# Altium PCB shield_can-display.PcbDoc (part 2 of 2)
Units mm, origin at the board's own origin, x right, y up, seen from the top; angles counter-clockwise.
Board outline 185 x 125 mm, 2 copper layers (Top Layer, Bottom Layer), stack 1.57 mm thick; 102 components, 185 nets, 477 pads, 180 vias.
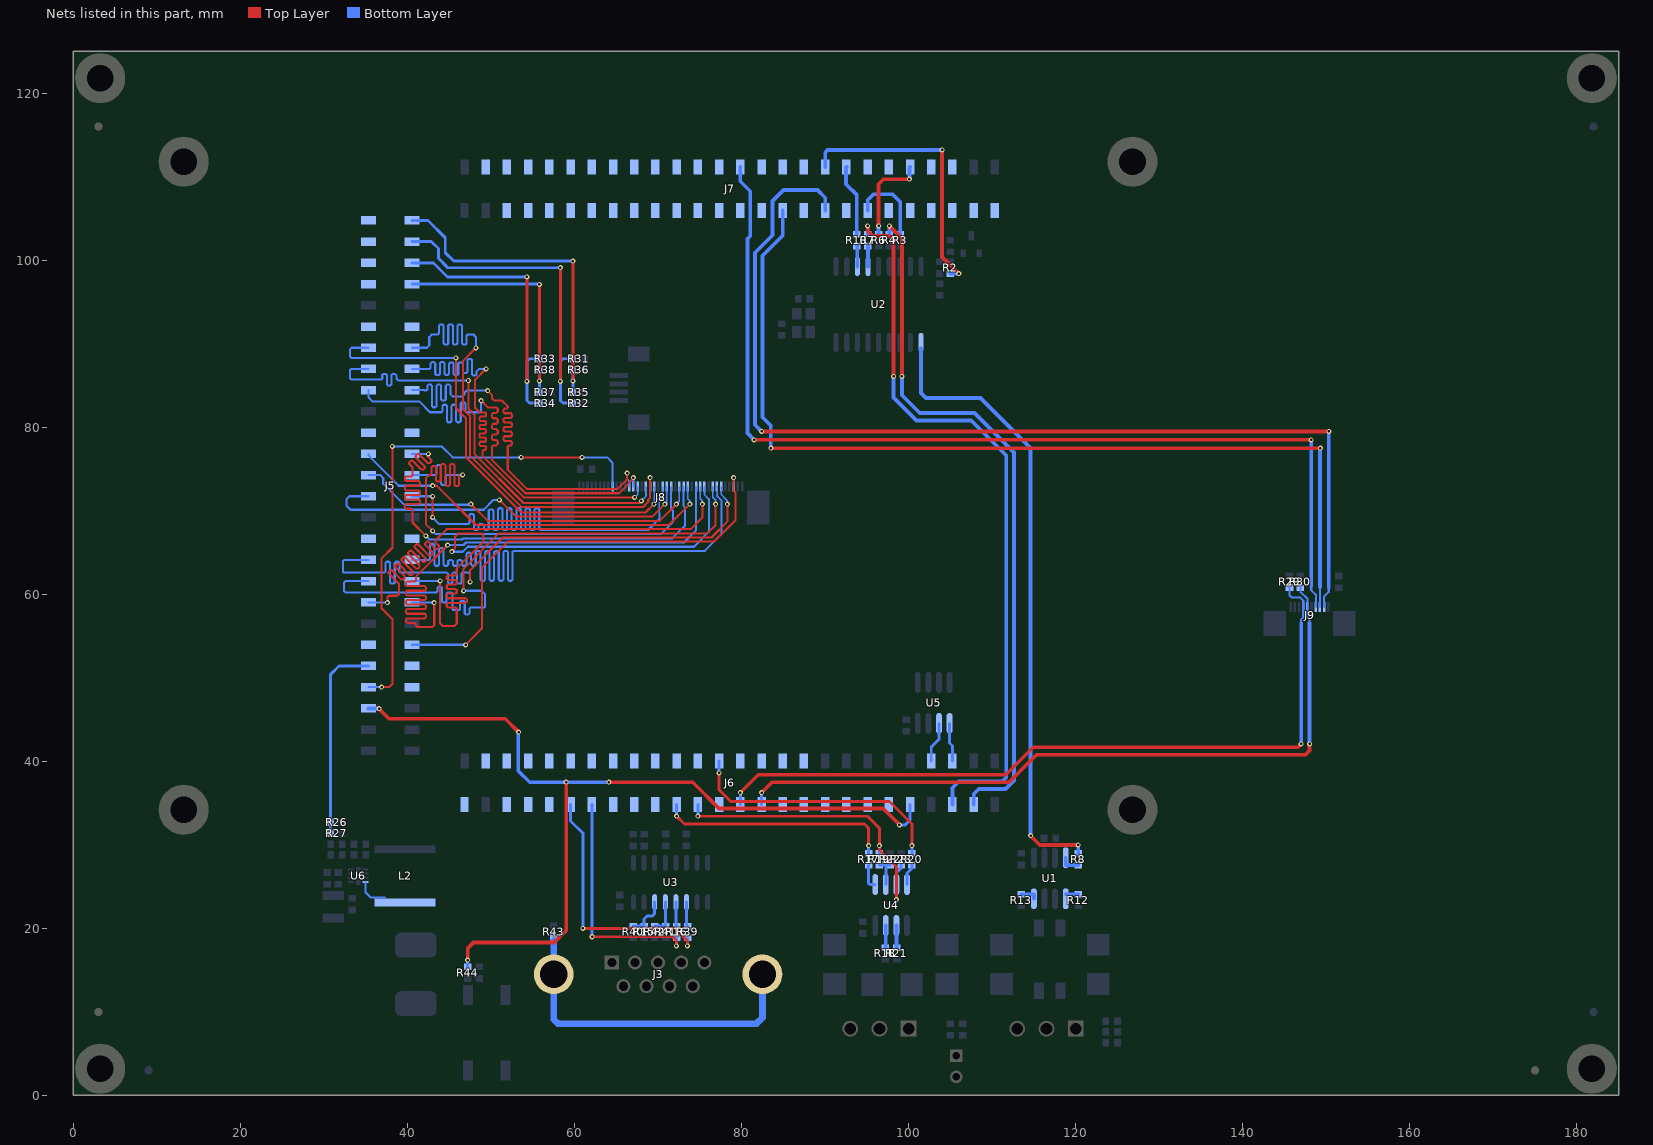
[diagram p2: the nets of this part, all layers, seen from the top]

## Via types
v1: diameter 0.6, hole 0.3, Top Layer to Bottom Layer, 180 vias

## Nets (pads, with @x,y where several pads share a name; then routed paths per layer and width w, separated by ;. In a path a pad name is that pad's centre, name@x,y a point inside that pad or via, vN(x,y) a via of type N, cw(c..) or ccw(c..) an arc to the next point about the centre after c; other vN are vias at no path point) (continued)
NetR7_2: R7.2 U2.13 | length 2.5
  Bottom Layer w0.45: R7.2@95.1,101.7 95.13,101.67 U2.13@95.13,99.25
NetR8_1: R8.1 U2.1 | length 74.8
  Top Layer w0.45: v1(114.6,31.1) 115.7,30 v1(120.3,30)
  Bottom Layer w0.45: U2.1@101.48,89.45 101.48,84.093 102.073,83.5 108.618,83.5 114.6,77.518 v1(114.6,31.1) ; R8.1@120.3,29 v1(120.3,30)
NetR8_2: R8.2 U1.4 | length 2.3
  Bottom Layer w0.45: U1.4@118.805,28.45 118.805,27.6 R8.2@120.3,27.6
NetR10_2: R10.2 U2.12 | length 2.5
  Bottom Layer w0.45: R10.2@93.8,101.7 93.86,101.64 U2.12@93.86,99.25
NetR13_2: R13.2 U1.8 | length 2
  Bottom Layer w0.45: R13.2@113.5,24.1 114.995,24.1 U1.8@114.995,23.55
NetR15_1: R15.1 R40.1 U3.14 | length 5.1
  Bottom Layer w0.35: R40.1@67.029,20.275 R15.1@68.329,20.275 68.329,21.129 68.7,21.5 69.3,21.5 69.595,21.795 U3.14@69.595,23.15
NetR16_2: R16.2 U3.12 | length 2.9
  Bottom Layer w0.35: U3.12@72.135,23.15 72.135,20.369 R16.2@72.229,20.275
NetR17_1: R17.1 U4.1 | length 3.1
  Bottom Layer w0.35: R17.1@95.2,27.6 95.2,25.4 95.35,25.25 U4.1@95.995,25.25
NetR18_1: R18.1 U4.7 | length 2.7
  Bottom Layer w0.45: R18.1@97.2,17.7 97.265,17.765 U4.7@97.265,20.35
NetR19_1: R19.1 R22.2 U4.2 | length 3.7
  Bottom Layer w0.35: R19.1@96.5,27.6 97.3,27.6 ; U4.2@97.265,25.25 97.265,27.565 97.3,27.6 ; R22.2@97.8,27.6 97.3,27.6
NetR20_1: R20.1 U4.4 | length 2.6
  Bottom Layer w0.35: U4.4@99.805,25.25 99.805,26.605 100.4,27.2 R20.1@100.4,27.6
NetR21_1: R21.1 U4.6 | length 2.7
  Bottom Layer w0.45: U4.6@98.535,20.35 98.535,17.765 R21.1@98.6,17.7
NetR39_2: R39.2 U3.11 | length 2.9
  Bottom Layer w0.35: U3.11@73.405,23.15 73.405,20.399 R39.2@73.529,20.275
NetR41_1: R41.1 R42.1 U3.13 | length 4.2
  Bottom Layer w0.35: R42.1@69.629,20.275 R41.1@70.929,20.275 70.865,20.339 U3.13@70.865,23.15
PA0_LCDDAT0_TMS_A7: J5.41
PA1_LCDDAT1_F6: J5.42
PA2_LCDDAT2_G1_TXCK_E6: J5.39 J8.22 | length 55.9
  Top Layer w0.25: v1@45.8,88.2 45.8,82.3 47,81.1 47,76.4 53.6,69.8 68.5,69.8 v1(69.5,70.8)
  Bottom Layer w0.2: v1@69.5,70.9 69.55,70.95 J8.22@69.55,72.89 J8.22@69.5,72.84
  Bottom Layer w0.25: J5.39@35.34,89.52 33.32,89.52 33.1,89.3 33.1,88.5 33.3,88.3 v1(45.8,88.3)
PA3_LCDDAT3_G1_RXCK_C6: J5.40 J8.23 | length 65.8
  Top Layer w0.25: v1(48.2,89.5) 46.625,87.925 46.625,82.182 47.5,81.307 47.5,76.607 53.674,70.433 68.188,70.433 68.825,71.07 68.825,71.325 69.05,71.55 v1(69.05,73.98)
  Bottom Layer w0.2: J8.23@69.05,72.89 v1(69.05,73.98)
  Bottom Layer w0.25: J5.40@40.54,89.52 42.28,89.52 42.3,89.5 42.6,89.8 42.6,90.8 42.9,91.1 43.637,91.1 43.775,91.238 43.775,92.162 43.912,92.3 44.187,92.3 44.325,92.162 44.325,90.038 44.462,89.9 44.737,89.9 44.875,90.038 44.875,92.162 45.012,92.3 45.287,92.3 45.425,92.162 45.425,90.038 45.562,89.9 45.837,89.9 45.975,90.038 45.975,92.162 46.112,92.3 46.387,92.3 46.525,92.162 46.525,90.038 46.662,89.9 46.937,89.9 47.075,90.038 47.075,90.963 47.212,91.1 47.9,91.1 48.2,90.8 v1(48.2,89.5)
PA4_LCDDAT4_G1_TXEN_D6: J5.37 J8.24 | length 54.6
  Top Layer w0.25: v1(47.3,85.6) 47.3,82.214 48,81.514 48,76.814 53.881,70.933 67.733,70.933 v1(68,71.2)
  Bottom Layer w0.2: v1(68,71.2) 68.55,71.75 J8.24@68.55,72.89
  Bottom Layer w0.25: J5.37@35.34,86.98 33.28,86.98 33.1,86.8 33.1,85.9 33.3,85.7 36.837,85.7 36.975,85.837 36.975,86.262 37.112,86.4 37.387,86.4 37.525,86.262 37.525,85.138 37.662,85 37.937,85 38.075,85.138 38.075,86.262 38.212,86.4 38.487,86.4 38.7,86.187 38.7,85.8 38.9,85.6 v1(47.3,85.6)
PA5_LCDDAT5_G1_TXER_B6: J5.38 J8.26 | length 61.7
  Top Layer w0.25: v1(49.4,87) 48.1,85.7 48.1,82.3 48.629,81.771 49.275,81.771 49.4,81.646 49.4,81.396 49.275,81.271 48.725,81.271 48.6,81.146 48.6,80.896 48.725,80.771 49.275,80.771 49.4,80.646 49.4,80.396 49.275,80.271 48.725,80.271 48.6,80.146 48.6,79.896 48.725,79.771 49.275,79.771 49.4,79.646 49.4,79.396 49.275,79.271 48.725,79.271 48.6,79.146 48.6,78.896 48.725,78.771 49.275,78.771 49.4,78.646 49.4,78.396 49.275,78.271 48.725,78.271 48.6,78.146 48.6,77.896 48.725,77.771 49.275,77.771 49.4,77.646 49.4,77.396 49.275,77.271 49.125,77.271 49,77.146 49,76.521 53.921,71.6 67.192,71.6 v1(67.2,71.608)
  Bottom Layer w0.2: v1(67.2,71.608) 67.55,71.958 J8.26@67.55,72.89
  Bottom Layer w0.25: J5.38@40.54,86.98 42.618,86.98 42.775,87.138 42.775,87.658 42.912,87.796 43.187,87.796 43.325,87.658 43.325,86.402 43.462,86.264 43.737,86.264 43.875,86.402 43.875,87.658 44.012,87.796 44.287,87.796 44.425,87.658 44.425,86.402 44.562,86.264 44.837,86.264 44.975,86.402 44.975,87.616 45.112,87.754 45.387,87.754 45.525,87.616 45.525,86.402 45.662,86.264 45.937,86.264 46.075,86.402 46.075,87.616 46.212,87.754 46.487,87.754 46.625,87.616 46.625,86.617 46.762,86.479 47.037,86.479 47.175,86.617 47.175,88.058 47.312,88.196 47.587,88.196 47.725,88.058 47.725,86.334 47.862,86.196 48.137,86.196 48.275,86.334 48.275,86.7 48.575,87 v1(49.4,87)
PA6_LCDDAT6_G1_CRS_A6: J5.35 J8.27 | length 58.9
  Top Layer w0.25: v1(48.8,83.2) 49.625,82.375 50.637,82.375 50.8,82.213 50.8,81.888 50.637,81.725 50.262,81.725 50.1,81.563 50.1,81.238 50.262,81.075 50.637,81.075 50.8,80.913 50.8,80.588 50.637,80.425 50.262,80.425 50.1,80.263 50.1,79.938 50.262,79.775 50.637,79.775 50.8,79.613 50.8,79.288 50.637,79.125 50.262,79.125 50.1,78.963 50.1,78.638 50.262,78.475 50.637,78.475 50.8,78.313 50.8,77.988 50.637,77.825 50.262,77.825 50.1,77.663 50.1,76.128 54.128,72.1 65.332,72.1 67.05,73.818 v1(67.05,73.98)
  Bottom Layer w0.2: J8.27@67.05,72.89 v1(67.05,73.98)
  Bottom Layer w0.25: J5.35@35.34,84.44 35.34,83.56 35.8,83.1 41.4,83.1 42.7,81.8 44.037,81.8 44.175,81.937 44.175,82.563 44.312,82.7 44.587,82.7 44.725,82.563 44.725,80.738 44.862,80.6 45.137,80.6 45.275,80.738 45.275,82.563 45.412,82.7 45.687,82.7 45.825,82.563 45.825,80.738 45.962,80.6 46.237,80.6 46.375,80.738 46.375,82.862 46.512,83 46.787,83 46.925,82.862 46.925,81.937 47.062,81.8 48.657,81.8 48.8,81.943 v1(48.8,83.2)
PA7_LCDDAT7_E5: J5.36 J8.28 | length 55.5
  Top Layer w0.25: v1(49.58,84.4) 50.1,83.88 50.1,83.5 50.4,83.2 51.3,83.2 52,82.5 52,82.363 51.862,82.225 51.638,82.225 51.5,82.088 51.5,81.813 51.638,81.675 52.362,81.675 52.5,81.538 52.5,81.263 52.362,81.125 51.638,81.125 51.5,80.988 51.5,80.713 51.638,80.575 52.362,80.575 52.5,80.438 52.5,80.163 52.362,80.025 51.638,80.025 51.5,79.888 51.5,79.613 51.638,79.475 52.362,79.475 52.5,79.338 52.5,79.063 52.362,78.925 51.638,78.925 51.5,78.788 51.5,78.513 51.638,78.375 52.362,78.375 52.5,78.238 52.5,77.963 52.362,77.825 52.138,77.825 52,77.688 52,74.936 54.336,72.6 65.125,72.6 66.3,73.775 v1(66.3,74.5)
  Bottom Layer w0.2: v1(66.3,74.5) 66.3,73.811 66.55,73.561 J8.28@66.55,72.89
  Bottom Layer w0.25: J5.36@40.54,84.44 42.06,84.44 42.1,84.4 42.237,84.4 42.375,84.537 42.375,84.962 42.512,85.1 42.787,85.1 42.925,84.962 42.925,82.538 43.062,82.4 43.337,82.4 43.475,82.538 43.475,84.962 43.612,85.1 43.887,85.1 44.025,84.962 44.025,83.338 44.162,83.2 44.437,83.2 44.575,83.338 44.575,84.962 44.712,85.1 44.987,85.1 45.125,84.962 45.125,83.975 45.4,83.7 46.6,83.7 46.8,83.9 46.8,84.1 47.1,84.4 v1(49.58,84.4)
PA8_LCDDAT8_TCK_A5: J5.31
PA9_LCDDAT9_G1_COL_F4: J5.32
PA10_LCDDAT10_G1_RXDV_F5: J5.29 J8.14 | length 45.3
  Top Layer w0.25: v1(43,73) 43.5,73 48.2,68.3 71.3,68.3 v1(73.8,70.8)
  Bottom Layer w0.2: J8.14@73.55,72.89 73.55,71.45 73.8,71.2 v1(73.8,70.8)
  Bottom Layer w0.25: J5.29@35.34,76.82 35.34,76.6 38.94,73 v1(43,73)
PA11_LCDDAT11_G1_RXER_D5: J5.30 J8.15 | length 67.7
  Top Layer w0.25: v1(42.2,67) 40.6,68.6 40.6,70.108 40.462,70.245 39.837,70.245 39.7,70.383 39.7,70.658 39.837,70.795 41.363,70.795 41.5,70.933 41.5,71.208 41.363,71.345 39.837,71.345 39.7,71.483 39.7,71.758 39.837,71.895 41.363,71.895 41.5,72.033 41.5,72.308 41.363,72.445 39.837,72.445 39.7,72.583 39.7,72.858 39.837,72.995 41.363,72.995 41.5,73.133 41.5,73.408 41.363,73.545 39.837,73.545 39.7,73.683 39.7,73.958 39.837,74.095 40.462,74.095 40.6,74.233 40.6,75.22 40.211,75.609 40.211,75.804 40.405,75.998 40.6,75.998 41.678,74.92 41.872,74.92 42.067,75.114 42.067,75.309 40.989,76.387 40.989,76.582 41.183,76.776 41.377,76.776 42.456,75.698 42.65,75.698 42.845,75.892 42.845,76.087 42.403,76.528 42.403,76.723 v1(42.5,76.82)
  Bottom Layer w0.2: J8.15@73.05,72.89 73.05,70.55 73.2,70.4
  Bottom Layer w0.25: J5.30@40.54,76.82 v1(42.5,76.82) ; v1(42.2,67) 42.625,66.575 46.575,66.575 46.7,66.7 71.7,66.7 73.075,68.075 ; 72.9,67.9 73.2,68.2 73.2,70.4
PA12_LCDDAT12_G1_RX0_G5: J5.27 J8.16 | length 42.6
  Top Layer w0.25: v1(47.6,70.8) 49.6,68.8 70.2,68.8 v1(72.2,70.8)
  Bottom Layer w0.2: v1(72.2,70.8) 72.55,71.15 J8.16@72.55,72.89
  Bottom Layer w0.25: J5.27@35.34,74.28 36.72,74.28 37.1,73.9 37.1,73.24 39.615,70.725 47.525,70.725 v1(47.6,70.8)
PA13_LCDDAT13_G1_RX1_C5: J5.28 J8.18 | length 68.4
  Top Layer w0.25: v1(43,67.6) 42.2,68.4 42.2,73.88 42.6,74.28 42.737,74.28 42.875,74.418 42.875,75.215 43.012,75.353 43.287,75.353 43.425,75.215 43.425,73.638 43.562,73.5 43.837,73.5 43.975,73.638 43.975,75.443 44.112,75.58 44.387,75.58 44.525,75.443 44.525,73.118 44.662,72.98 44.937,72.98 45.075,73.118 45.075,75.443 45.212,75.58 45.487,75.58 45.625,75.443 45.625,73.118 45.762,72.98 46.037,72.98 46.175,73.118 46.175,74.143 46.312,74.28 46.58,74.28 v1(46.6,74.3)
  Bottom Layer w0.2: J8.18@71.55,72.89 71.55,70.25 71.6,70.2
  Bottom Layer w0.25: J5.28@40.54,74.28 43.337,74.28 43.475,74.418 43.475,75.343 43.612,75.48 43.887,75.48 44.025,75.343 44.025,73.218 44.162,73.08 44.437,73.08 44.575,73.218 44.575,74.143 44.712,74.28 46.58,74.28 v1(46.6,74.3) ; v1(43,67.6) 43.4,67.2 70.3,67.2 71.8,68.7 71.8,70 71.6,70.2
PA14_LCDDAT14_G1_TX0_E4: J5.25 J8.19 | length 46
  Top Layer w0.25: v1(51,71.3) 53,69.3 69.3,69.3 v1(70.8,70.8)
  Bottom Layer w0.2: v1(70.8,70.8) 71.05,71.05 J8.19@71.05,72.89
  Bottom Layer w0.25: J5.25@35.34,71.74 33.04,71.74 32.7,71.4 32.7,70.6 33.175,70.125 49.125,70.125 50.3,71.3 v1(51,71.3)
PA15_LCDDAT15_G1_TX1_B5: J5.26 J8.20 | length 69.9
  Top Layer w0.25: v1(43,69.2) v1(43,71.74)
  Bottom Layer w0.2: 70.15,69.65 70.15,71.069 70.55,71.469 J8.20@70.55,72.89
  Bottom Layer w0.25: J5.26@40.54,71.74 v1(43,71.74) ; v1(43,69.2) 43.8,68.4 47.263,68.4 47.4,68.538 47.4,69.487 47.538,69.625 47.813,69.625 47.95,69.487 47.95,67.838 48.088,67.7 48.363,67.7 48.5,67.838 48.5,68.262 48.638,68.4 49,68.4 49.175,68.225 49.175,67.838 49.313,67.7 49.588,67.7 49.725,67.838 49.725,70.018 49.863,70.155 50.138,70.155 50.275,70.018 50.275,67.838 50.413,67.7 50.688,67.7 50.825,67.838 50.825,70.162 50.963,70.3 51.238,70.3 51.375,70.162 51.375,67.838 51.513,67.7 51.788,67.7 51.925,67.838 51.925,70.162 52.063,70.3 52.338,70.3 52.475,70.162 52.475,67.838 52.613,67.7 52.888,67.7 53.025,67.838 53.025,70.162 53.163,70.3 53.438,70.3 53.575,70.162 53.575,67.838 53.713,67.7 53.988,67.7 54.125,67.838 54.125,70.162 54.263,70.3 54.538,70.3 54.675,70.162 54.675,67.838 54.813,67.7 55.088,67.7 55.225,67.838 55.225,70.162 55.363,70.3 55.638,70.3 55.775,70.162 55.775,67.838 55.913,67.7 68.8,67.7 70.15,69.05 70.15,69.65
PA16_LCDDAT16_NTRST_H6: J5.21
PA17_LCDDAT17_D4: J5.22
PA18_LCDDAT18_G1_RX2_G4: J5.19 J8.6 | length 71.4
  Top Layer w0.25: v1(47.5,61.5) 47.5,62.9 51.4,66.8 76.4,66.8 78.3,68.7 v1(78.3,70.8)
  Bottom Layer w0.2: J8.6@77.55,72.89 77.55,71.95 78.3,71.2 v1(78.3,70.8)
  Bottom Layer w0.25: J5.19@35.34,64.12 32.42,64.12 32.3,64 32.3,62.7 32.4,62.6 37.237,62.6 37.375,62.737 37.375,63.762 37.512,63.9 37.787,63.9 37.925,63.762 37.925,61.438 38.062,61.3 38.337,61.3 38.475,61.438 38.475,63.762 38.612,63.9 38.887,63.9 39.025,63.762 39.025,62.737 39.162,62.6 44.687,62.6 44.825,62.462 44.825,61.438 44.962,61.3 45.237,61.3 45.375,61.438 45.375,62.462 45.512,62.6 45.787,62.6 45.925,62.462 45.925,61.438 46.062,61.3 46.337,61.3 46.475,61.438 46.475,62.462 46.612,62.6 47.3,62.6 47.5,62.4 v1(47.5,61.5)
PA19_LCDDAT19_G1_RX3_C4: J5.20 J8.7 | length 85.6
  Bottom Layer w0.2: 77.075,71.825 J8.7@77.075,72.865
  Bottom Layer w0.25: J5.20@40.54,64.12 42.38,64.12 42.4,64.1 42.537,64.1 42.675,64.237 42.675,65.913 42.812,66.051 43.087,66.051 43.225,65.913 43.225,63.561 43.362,63.424 43.637,63.424 43.775,63.561 43.775,65.396 43.912,65.534 44.187,65.534 44.325,65.396 44.325,63.561 44.462,63.424 44.737,63.424 44.875,63.561 44.875,63.962 45.012,64.1 45.287,64.1 45.425,63.962 45.425,63.561 45.562,63.424 45.837,63.424 45.975,63.561 45.975,63.962 46.112,64.1 46.387,64.1 46.525,63.962 46.525,63.561 46.662,63.424 46.937,63.424 47.075,63.561 47.075,64.837 47.212,64.974 47.487,64.974 47.625,64.837 47.625,63.554 47.762,63.416 48.037,63.416 48.175,63.554 48.175,65.039 48.312,65.176 48.587,65.176 48.725,65.039 48.725,61.761 48.862,61.624 49.137,61.624 49.275,61.761 49.275,65.039 49.412,65.176 49.687,65.176 49.825,65.039 49.825,61.761 49.962,61.624 50.237,61.624 50.375,61.761 50.375,65.039 50.512,65.176 50.787,65.176 50.925,65.039 50.925,61.761 51.062,61.624 51.337,61.624 51.475,61.761 51.475,65.039 51.612,65.176 51.887,65.176 52.025,65.039 52.025,61.761 52.162,61.624 52.437,61.624 52.575,61.761 52.575,65.075 52.7,65.2 75.6,65.2 77.575,67.175 77.575,71.253 77.075,71.753 77.075,71.825 ; J8.7@77.05,72.89 J8.7@77.075,72.865
PA20_LCDDAT20_G1_TX2_A3: J5.17 J8.8 | length 73.4
  Top Layer w0.25: v1(46.725,60.425) 46.725,63.08 50.945,67.3 75.9,67.3 76.9,68.3 v1(76.9,70.8)
  Bottom Layer w0.2: J8.8@76.55,72.89 76.55,71.607 76.9,71.256 v1(76.9,70.8)
  Bottom Layer w0.25: J5.17@35.34,61.58 32.58,61.58 32.4,61.4 32.4,60.4 32.6,60.2 43.437,60.2 43.575,60.337 43.575,60.787 43.712,60.925 43.987,60.925 44.125,60.787 44.125,59.137 44.262,59 44.537,59 44.675,59.137 44.675,60.062 44.812,60.2 45.275,60.2 45.4,60.075 45.4,58.2 45.5,58.1 46.2,58.1 46.3,58.2 46.3,59.063 46.438,59.2 46.713,59.2 46.85,59.063 46.85,57.737 46.988,57.6 47.263,57.6 47.4,57.737 47.4,58.262 47.538,58.4 49.2,58.4 49.3,58.5 49.3,60.025 48.9,60.425 v1(46.725,60.425)
PA21_LCDDAT21_G1_TX3_B4: J5.18 J8.10 | length 76.4
  Top Layer w0.25: v1(43.9,61.6) 43.9,56.5 44.2,56.2 45.6,56.2 45.9,56.5 45.9,58.288 45.762,58.425 44.837,58.425 44.7,58.563 44.7,58.838 44.837,58.975 46.962,58.975 47.1,59.113 47.1,59.388 46.962,59.525 44.837,59.525 44.7,59.663 44.7,59.938 44.837,60.075 45.762,60.075 45.9,60.213 45.9,60.488 45.762,60.625 44.837,60.625 44.7,60.763 44.7,61.038 44.837,61.175 45.762,61.175 45.9,61.313 45.9,61.588 45.762,61.725 44.837,61.725 44.7,61.863 44.7,62.138 44.837,62.275 45.762,62.275 45.9,62.413 45.9,63.1 49.1,66.3 49.1,67.1 48.9,67.3 46.1,67.3 45.7,66.9 45.7,65.5 v1(45.3,65.1)
  Bottom Layer w0.2: J8.10@75.55,72.89 75.55,71.905 76,71.455
  Bottom Layer w0.25: J5.18@40.54,61.58 43.88,61.58 v1(43.9,61.6) ; v1(45.3,65.1) 46.607,65.1 47.207,65.7 74.3,65.7 76.075,67.475 76.075,71.38 76,71.455
PA22_LCDDAT22_G1_MDC_B3: J5.15 J8.11 | length 72.5
  Top Layer w0.25: v1(37.6,59) 37.6,59.687 37.738,59.825 38.763,59.825 38.981,60.043 38.981,61.264 37.75,62.494 37.75,62.689 37.945,62.883 38.139,62.883 39.267,61.756 39.461,61.756 39.656,61.95 39.656,62.145 38.528,63.272 38.528,63.467 38.723,63.661 38.917,63.661 40.288,62.29 40.483,62.29 40.677,62.484 40.677,62.679 39.306,64.05 39.306,64.244 39.5,64.439 39.695,64.439 41.066,63.068 41.26,63.068 41.455,63.262 41.455,63.456 40.084,64.828 40.084,65.022 40.278,65.217 40.473,65.217 41.844,63.845 42.038,63.845 42.233,64.04 42.233,64.234 40.862,65.606 40.862,65.8 41.056,65.994 41.25,65.994 42.622,64.623 42.816,64.623 43.011,64.818 43.011,65.012 42.109,65.913 42.109,66.108 42.304,66.302 42.498,66.302 43.399,65.401 43.594,65.401 43.788,65.595 43.788,65.79 43.336,66.242 43.336,66.436 44.7,67.8 73.9,67.8 75.3,69.2 v1(75.3,70.8)
  Bottom Layer w0.2: J8.11@75.05,72.89 75.05,71.45 75.3,71.2 v1(75.3,70.8)
  Bottom Layer w0.25: J5.15@35.34,59.04 37.56,59.04 v1(37.6,59)
PA23_LCDDAT23_G1_MDIO_A4: J5.16 J8.12 | length 74.7
  Top Layer w0.25: v1(43.2,59) 43.2,56.3 43,56.1 41.2,56.1 41,56.3 41,56.437 40.862,56.575 39.937,56.575 39.8,56.712 39.8,56.987 39.937,57.125 42.062,57.125 42.2,57.262 42.2,57.537 42.062,57.675 39.937,57.675 39.8,57.812 39.8,58.087 39.937,58.225 42.062,58.225 42.2,58.362 42.2,58.637 42.062,58.775 39.937,58.775 39.8,58.912 39.8,59.187 39.937,59.325 42.062,59.325 42.2,59.462 42.2,59.737 42.062,59.875 39.937,59.875 39.8,60.012 39.8,60.287 39.937,60.425 42.062,60.425 42.2,60.562 42.2,60.837 42.062,60.975 39.937,60.975 39.8,61.112 39.8,61.387 39.937,61.525 40.862,61.525 41,61.662 41,62.1 v1(44.8,65.9)
  Bottom Layer w0.2: 74.55,71.45 J8.12@74.55,72.89
  Bottom Layer w0.25: J5.16@40.54,59.04 43.24,59.04 v1(43.2,59) ; v1(44.8,65.9) 46.7,65.9 47,66.2 73.1,66.2 74.55,67.65 74.55,71.45
PA24_LCDPWM_PCK0_H5: J5.9 R26.2 R27.1 | length 24
  Bottom Layer w0.35: R27.1@30.8,31.4 30.8,50.42 31.8,51.42 J5.9@35.34,51.42
PA25_LCDDISP_TD0_F3: J5.11
PA26_LCDVSYNC_PWMH0_SP1_NPCS1_E3: J5.10
PA27_LCDHSYNC_PWML0_SPI1_NPCS2_H4: J5.8
PA28_LCDPCK_PWMH1_SP1_NPCS3_G3: J5.12 J8.3 | length 55.5
  Top Layer w0.25: v1(46.96,53.96) 48.9,55.9 48.9,63.2 52,66.3 76.7,66.3 79.275,68.875 79.275,72.18 79.05,72.405 v1(79.05,73.98)
  Bottom Layer w0.2: J8.3@79.05,72.89 v1(79.05,73.98)
  Bottom Layer w0.25: J5.12@40.54,53.96 v1(46.96,53.96)
PA29_LCDDEN_PWML1_J5: J5.7 J8.32 | length 62.5
  Top Layer w0.25: v1(36.9,48.9) 37.8,48.9 38.2,49.3 38.2,57 36.9,58.3 36.9,64.3 38.2,65.6 v1(38.2,77.7) ; v1(53.6,76.4) v1(60.9,76.4)
  Bottom Layer w0.25: J5.7@35.34,48.88 36.88,48.88 v1(36.9,48.9) ; v1@38.2,77.703 44.097,77.703 45.4,76.4 v1(53.6,76.4) ; v1(60.9,76.4) 63.9,76.4 64.55,75.75 J8.32@64.55,72.89
PA30_TWD0_D3: J6.47 U5.5 | length 4.7
  Bottom Layer w0.35: U5.5@104.905,44.55 104.905,42.195 105.25,41.85 J6.47@105.25,40.04
PA31_TWCK0_J4: J6.45 U5.6 | length 4.9
  Bottom Layer w0.35: J6.45@102.71,40.04 102.71,41.71 103.635,42.635 U5.6@103.635,44.55
PB1_G0_RXCK_SCK2_ISI_PCK_A2: J6.3
PB3_G0_TXER_CTS2_ISI_VSYNC_C2: J6.6
PB4_G0_CRS_RXD2_ISI_HSYNC_J3: J6.14 R16.1 | length 27.7
  Top Layer w0.35: v1(62.1,19) 71.7,19 72.2,18.5 v1(72.2,17.9)
  Bottom Layer w0.35: v1@62.07,19 J6.14@62.07,34.84 ; v1(72.2,17.9) 72.2,18.846 R16.1@72.229,18.875
PB5_G0_COL_TXD2_PCK2_H2: J6.12 R39.1 | length 30.1
  Top Layer w0.35: v1(61,20) 72,20 73.5,18.5 v1(73.5,17.9)
  Bottom Layer w0.35: J6.12@59.53,34.84 59.53,32.87 61,31.4 v1(61,20) ; v1(73.5,17.9) R39.1@73.5,18.846
PB10_G0_RX2_PCK2_PWML1_F1: J6.10
PB11_G0_RX3_RTS2_PWMH1_K4: J6.13
PB14_G0_TX2_SPI2_NPCS1_PWMH0_A1: J6.5
PB15_G0_TX3_SPI2_NPCS2_PWML0_E2: J6.7
PB18_SPI1_MISO_K2: J5.45
PB19_SPI1_MOSI_C1: J5.47
PB20_SPI1_SPCK__D1: J5.49
PB21_SPI1_NPCS0_L3: J6.15
PB22_SPI1_NPCS1_G1: J6.9
PB23_SPI1_NPCS2_H1: J5.51
PB24_DRXD_TDI_E1: J6.8
PB25_DTXD_TDO_J1: J6.11
PB26_PCK0_RK0_PWMH0_M5: J7.45
PB27_SPI1_NPCS3_TK0_PWML0_L2: J6.17
PB28_SPI2_NPCS3_TD0_PWMH1_K1: J6.16
PB29_TWD2_RD0_PWML1_M3: J6.42
PB30_TWCK2_RF0_M4: J6.34
PB31_TF0_L1: J6.18
PC0_SPI0_MISO_PWMH2_ISI_D8: J6.50 R4.1 | length 84.1
  Top Layer w0.45: v1(97.7,104.1) 99.2,102.6 v1(99.2,86.1)
  Bottom Layer w0.45: R4.1@97.7,103.1 v1(97.7,104.1) ; v1(99.2,86.1) 99.2,83.827 101.327,81.7 107.873,81.7 112.6,76.973 112.6,37.7 111.6,36.7 108.4,36.7 107.79,36.09 J6.50@107.79,34.84
PC1_SPI0_MOSI_PWML2_ISI_D9_P8: J7.43 R6.1 | length 11.4
  Top Layer w0.45: v1(96.4,104.1) 96.4,109.1 97,109.7 v1(100.1,109.7)
  Bottom Layer w0.45: R6.1@96.4,103.1 v1(96.4,104.1) ; v1(100.1,109.7) 100.1,111.09 J7.43@100.17,111.16
PC2_SPI0_SPCK_PWMH3_ISI_D10_V5: J6.48 R7.1 | length 87.8
  Top Layer w0.45: v1(95.1,104.1) 95.1,103.5 95.7,102.9 97.627,102.9 98.2,102.327 v1(98.2,86.1)
  Bottom Layer w0.45: R7.1@95.1,103.1 v1(95.1,104.1) ; v1(98.2,86.1) 98.2,83.554 100.954,80.8 107.5,80.8 111.7,76.6 111.7,38.1 111.2,37.6 106,37.6 105.25,36.85 J6.48@105.25,34.84
PC3_SPI0_NPCS0_PWML3_ISI_D11_T9: J7.40 R3.1 | length 9.7
  Bottom Layer w0.45: J7.40@95.09,105.96 95.1,105.97 95.1,107.2 95.8,107.9 98.054,107.9 98.987,106.967 98.987,103.113 R3.1@99,103.1
PC4_SPI0_NPCS1_MCI0_CK_PCK1_W5: J7.33
PC19_ISI_D0_TK1_U14: J7.32 J9.3 | length 114.7
  Top Layer w0.45: v1(83.5,77.5) v1(149.3,77.5)
  Bottom Layer w0.25: J9.3@149.25,58.51 149.25,60.85
  Bottom Layer w0.45: v1(83.5,77.5) 83.5,80.2 82.5,81.2 82.5,100.527 84.93,102.957 J7.32@84.93,105.96 ; 149.25,60.85 149.25,77.45 v1(149.3,77.5)
PC20_ISI_D1_TF1_V11: J7.36 J9.2 | length 126.7
  Top Layer w0.45: v1(82.4,79.5) v1(150.3,79.5)
  Bottom Layer w0.25: J9.2@149.75,58.51 149.75,59.75 150.3,60.3 150.3,60.8
  Bottom Layer w0.45: v1(82.4,79.5) 81.6,80.3 81.6,100.9 83.7,103 83.7,107.094 85.006,108.4 89.1,108.4 90.01,107.49 J7.36@90.01,105.96 ; 150.3,60.8 v1(150.3,79.5)
PC21_ISI_D2_TD1_U15: J7.27 J9.4 | length 120.5
  Top Layer w0.45: v1(81.5,78.5) v1(148.2,78.5)
  Bottom Layer w0.25: 148.2,61 148.2,60.5 148.75,59.95 J9.4@148.75,58.51
  Bottom Layer w0.45: J7.27@79.85,111.16 79.85,109.45 81.033,108.267 81.033,102.906 80.7,102.573 80.7,79.3 v1(81.5,78.5) ; 148.2,61 v1(148.2,78.5)
PC22_ISI_D3_RF1_T15: J7.41
PC23_ISI_D4_RD1_U16: J7.28
PC24_ISI_D5_RK1_PCK1_T16: J7.30
PC25_ISI_D6_TWD3_URXD1_V17: J7.16
PC26_ISI_D7_TWCK3_UTXD1_R16: J7.25
PC27_AD0_SPI0_NPCS1_PWML0_U12: J5.46 R37.2 R38.2 | length 29.5
  Top Layer w0.35: v1(55.8,85.55) v1(55.8,97.1)
  Bottom Layer w0.35: J5.46@40.54,97.14 55.76,97.14 v1(55.8,97.1) ; R37.2@55.8,84.2 55.8,85.5 v1(55.8,85.55) R38.2@55.8,86.9
PC28_AD1_SPI0_NPCS2_PWML1_T11: J5.48 R33.2 R34.2 | length 34.9
  Top Layer w0.35: v1(54.3,85.5) v1(54.3,98)
  Bottom Layer w0.35: J5.48@40.54,99.68 43.12,99.68 44.8,98 v1(54.3,98) ; R34.2@55.8,82.9 54.6,82.9 54.3,83.2 v1(54.3,85.5) 54.3,87.9 54.6,88.2 R33.2@55.8,88.2
PC29_AD2_SPI0_NPCS3_PWMFI0_R13: J5.50 R31.2 R32.2 | length 41.3
  Top Layer w0.35: v1(58.3,85.5) v1(58.3,99.1)
  Bottom Layer w0.35: J5.50@40.54,102.22 42.88,102.22 43.7,101.4 43.7,100.23 44.83,99.1 v1(58.3,99.1) ; R32.2@59.8,82.9 58.6,82.9 58.3,83.2 v1(58.3,85.5) 58.3,87.9 58.6,88.2 R31.2@59.8,88.2
PC30_AD3_PWMH0_T12: J5.52 R35.2 R36.2 | length 39.4
  Top Layer w0.35: v1(59.8,85.55) v1(59.8,99.9)
  Bottom Layer w0.35: J5.52@40.54,104.76 42.44,104.76 44.515,102.685 44.515,100.9 45.49,99.925 59.775,99.925 v1(59.8,99.9) ; R35.2@59.8,84.2 59.8,85.5 v1(59.8,85.55) R36.2@59.8,86.9
PC31_AD4_PWMH1_T13: J7.31
PD8_PCK0_M1: J6.20
PD9_FIQ_M2: J6.19
PD10_CTS0_N2: J6.23
PD11_RTS0_SPI2_MISO_N3: J6.24 R19.2 R23.2 U4.3 | length 38.5
  Top Layer w0.35: v1(74.77,33.43) 95.07,33.43 96.5,32 v1(96.5,29.9) 96.5,29.4 98.535,27.365 v1(98.535,23.435)
  Bottom Layer w0.35: v1@74.74,33.4 v1(74.77,33.43) J6.24@74.77,34.84 ; R19.2@96.5,29 v1(96.5,29.9) ; v1(98.535,23.435) U4.3@98.535,25.25 98.535,26.635 99.1,27.2 R23.2@99.1,27.6
PD12_RXD0_N1: J6.22 R17.2 | length 28
  Top Layer w0.35: v1(72.23,33.43) 73.16,32.5 94.7,32.5 95.2,32 v1(95.2,29.9)
  Bottom Layer w0.35: v1@72.2,33.4 v1(72.23,33.43) J6.22@72.23,34.84 ; R17.2@95.2,29 v1(95.2,29.9)
PD13_TXD0_SPI2_MOSI_P3: J6.25 R20.2 | length 31.8
  Top Layer w0.35: v1(77.31,38.63) 77.31,36.59 78.7,35.2 97.7,35.2 100.4,32.5 v1(100.4,29.9)
  Bottom Layer w0.35: v1@77.28,38.6 v1(77.31,38.63) J6.25@77.31,40.04 ; R20.2@100.4,29 v1(100.4,29.9)
PD14_CTS1_P2: J6.33
PD15_RTS1_SPI2_SPCK_N4: J7.47
PD16_RXD1_R2: J6.32
PD17_TXD1_SPI2_NPCS0_R3: J6.31
PD19_P11: J7.35 R2.2 | length 32.5
  Top Layer w0.45: v1(104,113.2) 104,100.4 v1(106,98.4)
  Bottom Layer w0.45: J7.35@90.01,111.16 90.01,112.91 90.3,113.2 v1(104,113.2) ; R2.2@105,98.4 v1@106,98.4
PD20_T10: J7.48
PD21_P10: J7.39
PD22_U11: J7.38
PD23_R10: J7.42
PD24_U10: J7.37 R10.1 | length 8.6
  Bottom Layer w0.45: J7.37@92.55,111.16 92.5,111.11 92.5,109.1 93.8,107.8 R10.1@93.8,103.1
PD25_R11: J7.34
PD26_U13: J6.38
PD27_T14: J7.46
PD28_SCK0_R1: J6.27
PD29_SCK1_P1: J6.26
PD31_SPI0_NPCS2_PCK1_P5: J7.50
PE0_MCI0_CDB_CTS4_W19: J7.29
PE1_MCI0_DB0_U17: J7.20
PE2_MCI0_DB1_T17: J7.19
PE3_MCI0_DB2_P16: J7.22
PE4_MCI0_DB3_U18: J7.21
PE5_CTS3_R17: J7.18
PE6_TIOA3_V19: J7.13
PE7_TIOB3_PWMFI1_U19: J7.12
PE8_TCLK3_PWML3_T19: J7.24
PE9_TIOA2_T18: J7.11
PE10_TIOB2_N14: J7.44
PE11_TCLK2_R18: J7.7
PE12_TIOA1_PWMH2_P17: J7.15
PE13_TIOB1_PWML2_P18: J7.9
PE14_TCLK1_PWMH3_N17: J7.14
PE15_SCK3_TIOA0_N18: J7.6
PE16_RXD3_TIOB0_M15: J7.26
PE17_TXD3_TCLK0_N19: J7.5
PE24_RTS3_L19: J7.10
PE25_SCK4_IRQ_M17: J7.8
PE26_RXD4_L15: J7.23
PE27_TXD4_M16: J7.17
PE28_RTS4_L17: J7.3
PE29_DIBP_URXD0_TWD1_V1: J6.28 J9.7 R29.2 | length 91.1
  Top Layer w0.45: v1(79.85,36.25) 82,38.4 111.627,38.4 114.927,41.7 146.6,41.7 v1(147,42.1)
  Bottom Layer w0.25: R29.2@145.6,60.8 145.6,59.9 145.9,59.6 146.9,59.6 147.25,59.25 J9.7@147.25,58.49 147.25,57.25 147,57 147,56.6
  Bottom Layer w0.35: J6.28@79.85,34.84 v1(79.85,36.25) v1@79.88,36.28
  Bottom Layer w0.45: v1(147,42.1) 147,56.6
PE30_DIBN_UTXD0_TWCK1_U2: J6.30 J9.6 R30.2 | length 89.1
  Top Layer w0.45: v1(82.39,36.25) 83.64,37.5 112,37.5 115.3,40.8 147.5,40.8 148,41.3 v1(148,42.1)
  Bottom Layer w0.25: R30.2@146.9,60.8 146.9,60.307 147.75,59.457 J9.6@147.75,58.49 147.75,57.25 148,57 148,56.6
  Bottom Layer w0.35: J6.30@82.39,34.84 v1(82.39,36.25) v1@82.42,36.28
  Bottom Layer w0.45: v1(148,42.1) 148,56.6
PE31_ADTRG_L4: J6.21
PIOBU0_U3: J6.40
PIOBU1: J7.52
RESET: J5.5 J6.44 R44.2 | length 108.1
  Top Layer w0.45: v1(36.6,46.3) 37.8,45.1 51.7,45.1 v1(53.3,43.5) ; v1(47.2,16.2) 47.2,17.6 47.9,18.3 57.542,18.3 59,19.758 v1(59,37.5) ; v1(64.1,37.5) 74.15,37.5 77.3,34.35 96.95,34.35 v1(98.9,32.4)
  Bottom Layer w0.35: R44.2@47.2,15.4 v1(47.2,16.2) ; v1(98.9,32.4) 99.6,32.4 100.17,32.97 J6.44@100.17,34.84
  Bottom Layer w0.45: J5.5@35.34,46.34 36.56,46.34 v1(36.6,46.3) ; v1@53.267,43.5 53.267,38.859 54.626,37.5 v1(59,37.5) v1(64.1,37.5)
SHDN_T2: J6.29
SHLD: J3.10 J3.11 R43.2 | length 40.2
  Bottom Layer w0.8: R43.2@57.5,18.6 57.5,14.505 J3.10@57.505,14.5 57.505,9.095 58,8.6 81.8,8.6 82.495,9.295 J3.11@82.495,14.5
SW: L2.1 U6.4 | length 3.8
  Bottom Layer w0.25: U6.4@34.975,25.55 34.975,24.325 35.6,23.7 37.3,23.7
VBATT: J6.2
VREF_CAN: R12.1 U1.5 | length 1.5
  Bottom Layer w0.45: U1.5@118.805,24.1 R12.1@120.3,24.1
WKUP_V3: J6.36
pads on no net: "2.Fiducial Mark" "2_1.Fiducial Mark" "4.Fiducial Mark" "4_1.Fiducial Mark" "?.Fiducial Mark" "_1.Fiducial Mark" D1.2 J3.1 J3.4 J3.6 J3.7 J3.8 J3.9 J5.2 J5.3 J6.49 J6.51 J7.2 J8.33 J8.38 J8.Z1 J8.Z2 J9.5 J9.Z1 J9.Z2 J10.Z1 J10.Z2 U2.3 U2.4 U2.5 U2.6 U2.10 U2.11 U3.7 U3.8 U3.9 U3.10 U6.3 U6.6

## Polygon pours and split planes (outlines as drawn)
+5V on Bottom Layer "5v" (solid, remove dead copper, pour order 9): 36,26.3 50.1,26.3 50.8,27 50.8,36.2 50,37 45.4,37 45.2,37.2 44.8,37.6 44.8,42.9 44.8,44.4 44.5,44.7 44.3,44.9 38.9,44.9 38.5,44.9 38,44.4 38,39.3 37.7,39 36.5,39 35.1,39 34.3,38 34.3,26.3
LED+ on Bottom Layer "led+" (solid, pour order 8): 29.4,26 29,25.6 29,15.4 30.4,14 43.5,14 44.5,14 45,13.5 45,8.5 44.6,8.1 44.5,8.1 24.9,8.1 23.6,9.4 23.6,26.5 24.8,27.7 32,27.7 32.3,27.4 32.8,26.9 33.7,26.9 33.7,26
SW on Bottom Layer "sw" (solid, pour order 7): 34.7,25.7 35.3,26.3 36,26.3 50.1,26.3 50.8,25.6 50.8,21.2 50.1,20.5 35.5,20.5 35,21 34.7,21.3 34.7,25.7
GND on Bottom Layer "gnd" (solid, remove dead copper, pour order 10): 0.2,124.8 184.8,124.8 184.8,0.2 0.2,0.2
GND on Top Layer "gnd" (solid, remove dead copper, pour order 6): 0.2,124.8 184.8,124.8 184.8,0.2 0.2,0.2

## Silkscreen, mask and mechanical layers (free items; w line width, h text height)
Top Overlay:
  lines w0.35: 9.8,16.8 9.8,115.2 175,115.2 175,93.1 ; 11.7,10.1 133.5,10.1 ; 163,10.1 175,10.1 175,75.2
  text "EVA01 SHIELD" at 10.1,120.4 h5
  text "DISPLAY LCD 7''" at 10.1,117.2 h4
  text "Resistive Touch flat --->" at 145,83.8 h2
  text "Display LCD Flat --->" at 53.701,46.055 h2 r90
  text "Capacitive Touch flat --->" at 148.599,42.645 h2 r270
  text "<--- BackLight Cable" at 11.9,11.1 h2
  text "develboard" at 38.4,1.9 h6
Bottom Overlay:
  lines w0.2: 29.6,27.7 31.8,27.7 31.8,27.4 ; 35.7,28.8 35.7,31.2 ; 61.135,2 61.135,1.865 ccw(c62,1.865) 62,1 77.865,1 ccw(c77.865,2) 78.865,2 ; 66.6,21.5 67.8,21.5 67.8,21 ; 72.7,21 72.7,21.6 73.4,21.6 ; 38,9 44,9 44,13 38,13 38,9 ; 38,16 38,20 44,20 44,16 38,16
  lines w0.35: 26.4,30.8 9.8,30.8 9.8,115.2 130.2,115.2 130.2,30.8 119.3,30.8 ; 45,31 64.9,31 ; 77.6,31 94,31 ; 102.2,31 114.6,31
  text "UP" at 97.8,116.3 h5
  text "EVA01 SHIELD" at 173,110.1 h5
  text "EVA01 Board" at 15.5,106.1 h5 r90
  text "DISPLAY LCD 7''" at 172.9,106 h4
  text "develboard" at 154.3,95.8 h6
  text "Resistive Touch flat --->" at 167,83.8 h2
  text "Display LCD Flat --->" at 86.6,45.3 h2 r270
  text "EEPROM" at 106.4,42.8 h1.5 r270
  text "Autodetect" at 108.1,42.8 h1.5 r270
  text "Capacitive Touch flat --->" at 148.7,18.7 h2 r270
  text "<--- BackLight Cable" at 30.9,11.1 h2
  text "GND" at 113.5,9.7 h2
  text "H" at 117.1,9.692 h2
  text "L" at 120.5,9.677 h2
  text "GND" at 93.5,9.6 h2
  text "B" at 97.1,9.592 h2
  text "A" at 100.5,9.577 h2
  text "Rev.A" at 3.2,7.7 h2 r270
Top Solder:
  text "Develer" at 180.2,7.5 h2 r90
  text "EVA01 Shield" at 181.9,7.499 h2 r90
  text ".:DB:. Rev.A" at 183.6,7.499 h2 r90
Bottom Solder:
  text ".:DB:. Rev.A" at 1,6.9 h2 r270
Outline:
  lines w0.2: 0,0 0,10 0,125 175,125 185,125 185,115 185,0 10,0 0,0 ; 7,9.5 11,9.5 11,16 7,16 7,9.5 ; 55,45 55,64 85,64 85,45 55,45 ; 135,5 162.5,5 162.5,17.5 135,17.5 135,15 135,5 ; 171,77.5 175,77.5 181,77.5 181,92 171,92 171,77.5
Drawing:
  lines w0.2: 9.9,13 20.9,13 18.5,11.6 18.5,14.2 18.7,14.4 19.3,14.4 20.7,13 ; 41,17.5 41,10.1 10,10.1 ; 59.5,49 59.5,60 60.9,57.6 58.3,57.6 58.1,57.8 58.1,58.4 59.5,59.8 ; 60,74 60,115 ; 66.5,82.2 174,82.2 ; 66.5,84.75 174,84.75 ; 66.5,87.3 174,87.3 ; 95.8,112.1 95.8,123.1 97.2,120.7 94.6,120.7 94.4,120.9 94.4,121.5 95.8,122.9 ; 138,21.5 138,10.1 159,10.1 ; 148,10.1 148,62 150.5,62 ; 149.4,5.3 149.4,16.3 150.8,13.9 148.2,13.9 148,14.1 148,14.7 149.4,16.1 ; 159,21.5 159,10.1 ; 171,77.5 181,92 ; 171,92 181,77.5 ; 175,85.5 175,115 ; 10,10.1 175,10.1 ; 10,10.1 10,115 ; 10,115 130,115 130,31 10,31 10,82.5 ccw(c-13.744,89.1) 10,95.7 10,115 ; 10,115 175,115 ; 159,10.1 175,10.1 ; 175,10.1 175,115
  text "Mechanical Characteristics" at -0.6,129.1 h5
  text "UP" at 88,118 h5
  text "DISPLAY" at 140.7,110.9 h5
  text "Conn Touch RES" at 130.2,89.9 h5
  text "LCD_FLAT" at 62,54.5 h5
  text "EVA01" at 18.5,31.5 h5
  text "Conn Touch CAP" at 132,24.5 h5
  text "BackLight" at 16.5,16 h5
Assembly_top:
  text "Assembly TOP" at 12.328,118.439 h5
Assembly_bot:
  text "Assembly Bottom" at 49.328,118.439 h5
Note_top:
  text "Note TOP" at 12.328,118.439 h5
Note_bot:
  text "Note Bottom" at 49.228,118.539 h5
PCB_Note:
  lines w0.2: 7,9.5 11,9.5 11,16 7,16 7,9.5 ; 55,45 55,64 85,64 85,45 55,45 ; 135,5 162.5,5 162.5,17.5 135,17.5 135,15 135,5 ; 171,77.5 171,92 181,92 181,77.5 171,77.5
  text "Interna" at 175.6,82.9 h1.5 r90
  text "Scontornatura" at 173.9,81.9 h1.5 r90
  text "Scontornatura" at 57.5,56.7 h3
  text "Interna" at 57.8,53.9 h3
  text "Scontornatura" at 137,14 h3
  text "Interna" at 137.2,11.5 h3
  text "Interna" at 9.1,10 h1 r90
  text "Scontornatura" at 8.1,9.6 h1 r90

## Dimensions
11,16 to 11,9.5 on PCB_Note
7,16 to 11,16 on PCB_Note
181,77.5 to 181,92 on PCB_Note
181,77.5 to 171,77.5 on PCB_Note
135,5 to 162.5,5 on PCB_Note
162.5,5 to 162.5,17.5 on PCB_Note
85,45 to 55,45 on PCB_Note
85,45 to 85,64 on PCB_Note
174,84.75 to 166,115 on Drawing
174,87.3 to 175,115 on Drawing
175,115 to 10,115 on Drawing
175,115 to 175,10.1 on Drawing

## Text inside footprints (layer, text, board x,y; h text height)
D2: Note_bot "K" at 111.4,19.85 h1 r90
D3: Note_bot "K" at 123,19.85 h1 r90
D4: Note_bot "K" at 90.8,11.55 h1 r270
D5: Note_bot "K" at 93.85,13.6 h1 r180
D6: Note_bot "K" at 104.3,11.55 h1 r270
J3: Bottom Overlay "1" at 64.41,18.775 h1.4 r180; Bottom Overlay "5" at 75.24,18.775 h1.4 r180; Bottom Overlay "9" at 73.955,11.575 h1.4 r180; Bottom Overlay "6" at 65.645,11.575 h1.4 r180
J5: Bottom Overlay "51" at 34.14,106.39 h1.4 r180; Bottom Overlay "52" at 40.94,106.35 h1.4 r180; Bottom Overlay "1" at 34.54,40.27 h1.4 r180; Bottom Overlay "2" at 40.94,40.47 h1.4 r180
J6: Bottom Overlay "51" at 111.96,41.24 h1.4 r90; Bottom Overlay "52" at 111.92,34.44 h1.4 r90; Bottom Overlay "1" at 45.84,40.84 h1.4 r90; Bottom Overlay "2" at 46.04,34.44 h1.4 r90
J7: Bottom Overlay "51" at 111.96,112.36 h1.4 r90; Bottom Overlay "52" at 111.92,105.56 h1.4 r90; Bottom Overlay "1" at 45.84,111.96 h1.4 r90; Bottom Overlay "2" at 46.04,105.56 h1.4 r90
J8: Bottom Overlay "1" at 81.095,72.771 h1.3; Bottom Overlay "40" at 59.886,72.771 h1.3
J9: Bottom Overlay "10" at 145.206,58.271 h1.4; Bottom Overlay "1" at 151.175,58.271 h1.4
J10: Bottom Overlay "1" at 65.5,87.2 h1.4 r90; Bottom Overlay "4" at 65.5,82.45 h1.4 r90
"Logo Develer": Bottom Overlay "develer" at 172.783,95.773 h4.4
"Logo Develer": Top Overlay "develer" at 18.9,1.8 h4.4
U2: Note_bot "1" at 101.4,91.7 h1 r270
U3: Note_bot "1" at 67.2,26.7 h1 r90